# Altium PCB 2WheelBLController.PcbDoc
Units mm, origin at the board's own origin, x right, y up, seen from the top; angles counter-clockwise.
Board outline 37.46 x 61.59 mm, 2 copper layers (Top Layer, Bottom Layer); 17 components, 18 nets, 126 pads, 9 vias.
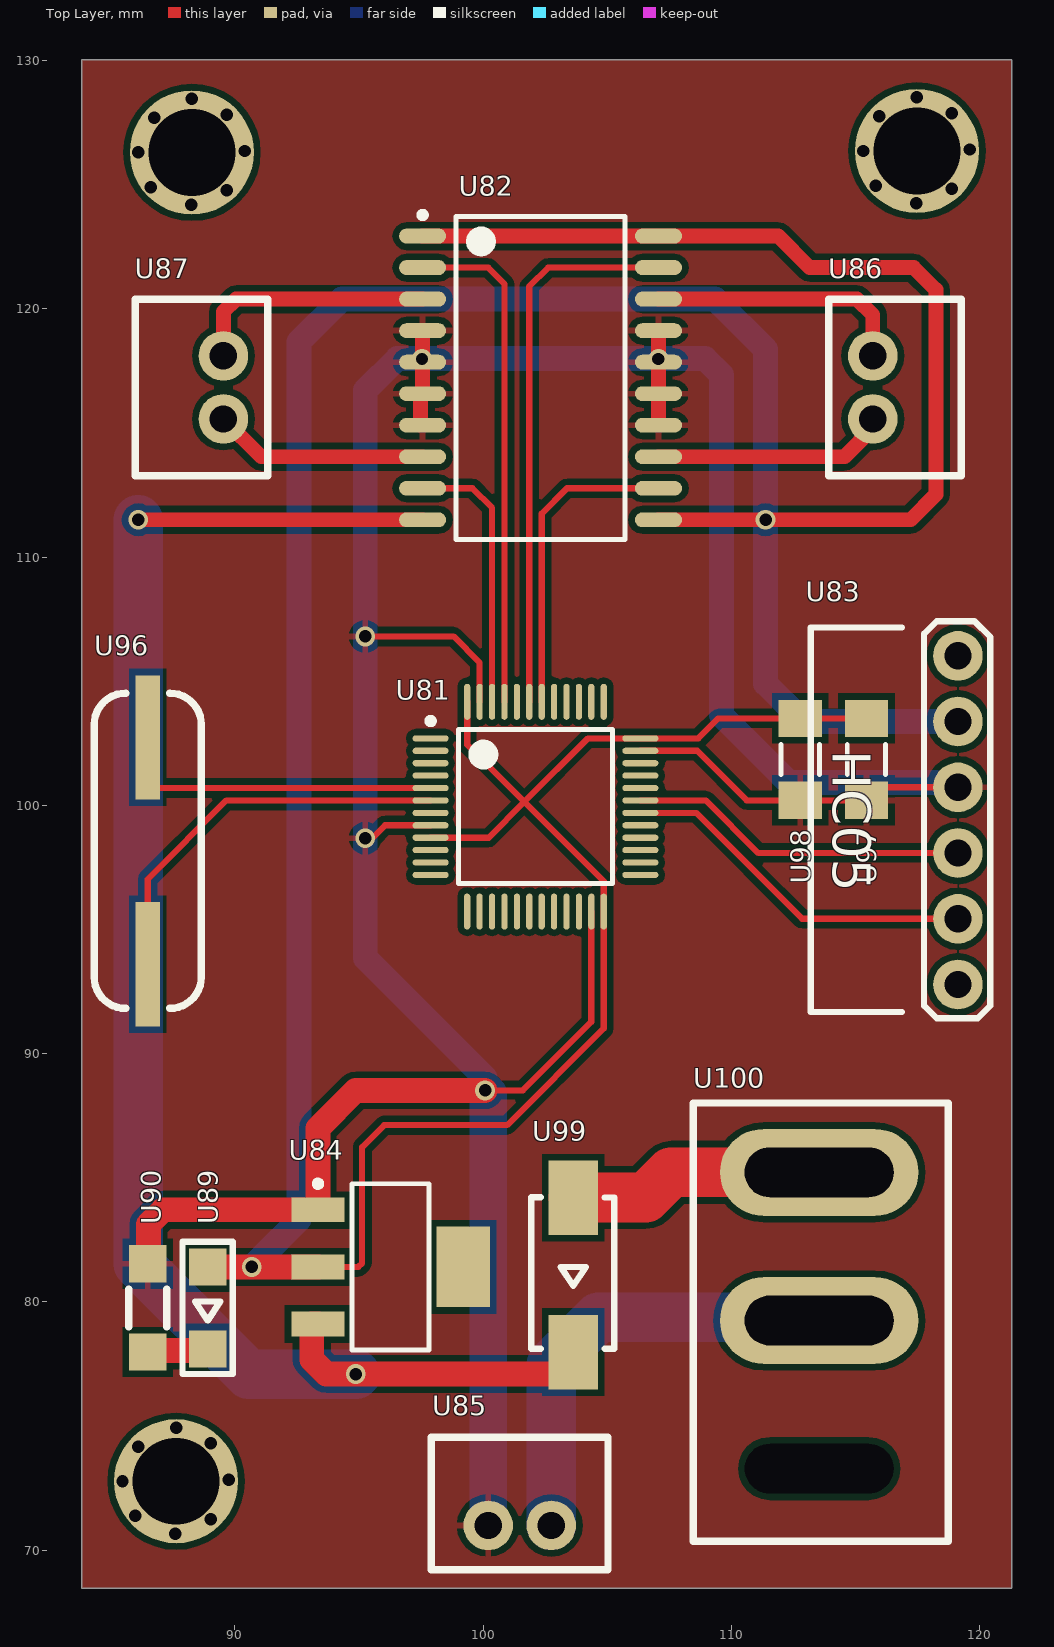
[diagram p0: Top Layer view]
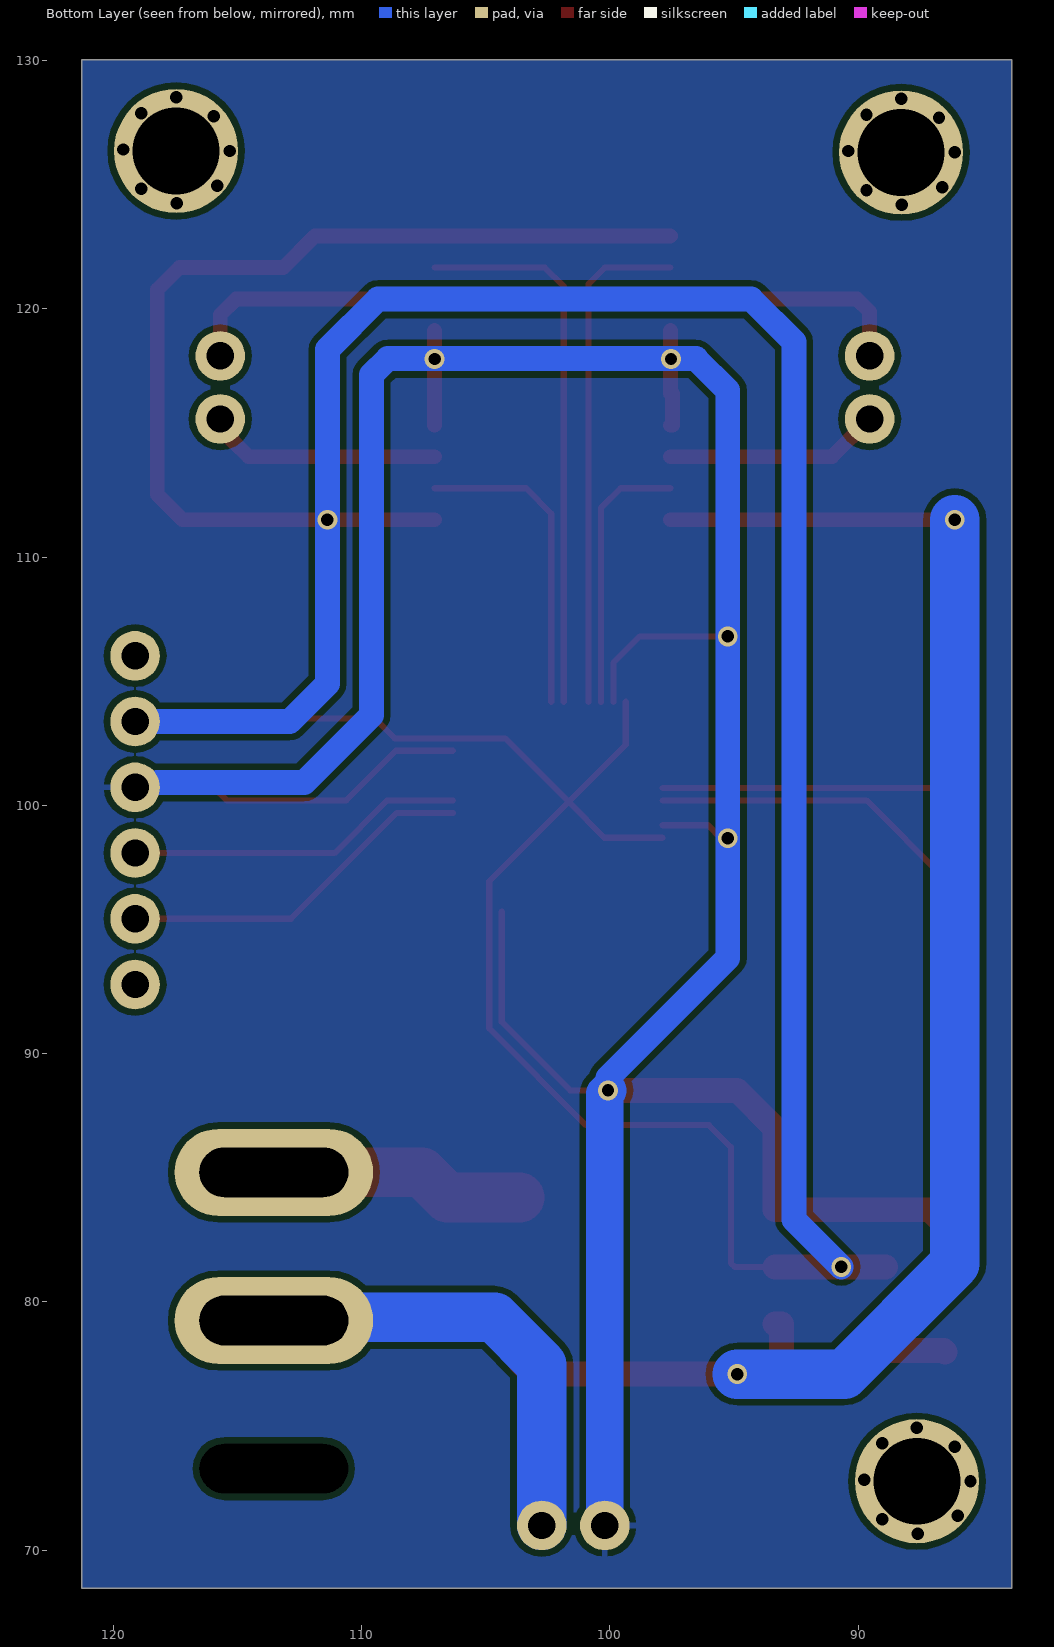
[diagram p1: Bottom Layer view, seen from below]
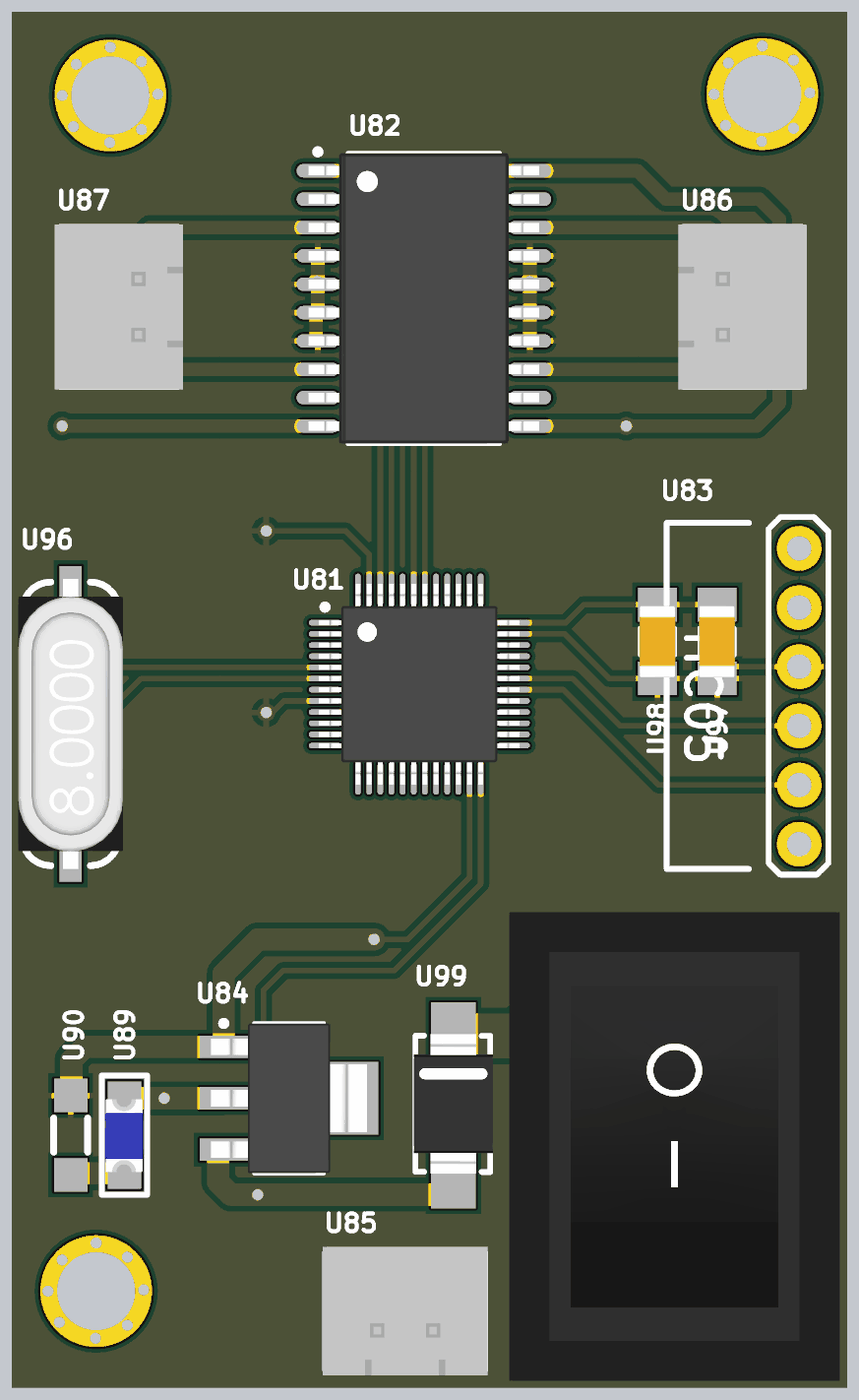
[diagram p2: 3D render of the assembled board from above, using the file's embedded part models]

## Layer stack, top to bottom
Top Solder: solder mask 0.0102, Solder Resist, Dk 3.5
Top Layer: signal copper 0.0356
Dielectric 1: dielectric 0.32, FR-4, Dk 4.8
Bottom Layer: signal copper 0.0356
Bottom Solder: solder mask 0.0102, Solder Resist, Dk 3.5

## Board outline
83.82,68.453 121.285,68.453 121.285,130.048 83.82,130.048

## Design rules (kind name [scope] priority, off if disabled: settings)
Clearance [All] p1: gap=0.254 ignorepadtopadclearanceinfootprint=FALSE except(0: Arc-Hole Track-Hole SMDPad-Hole THPad-Hole Via-Hole Fill-Hole Poly-Hole Region-Hole Text-Hole; 0.25: Arc-Arc Arc-Track Arc-SMDPad Track-Track Track-SMDPad SMDPad-SMDPad)
Height [All] p1 off: minheight=0 maxheight=25.4 prefheight=12.7
PolygonConnect [All] p1: connectstyle=Relief reliefconductorwidth=0.254 reliefentries=4 polygonreliefangle="90 Angle" airgapwidth=0.254
RoutingVias [All] p1: holewidth=0.5 width=0.8 viastyle="Through Hole" minholewidth=0.5 minwidth=0.8 maxholewidth=0.711 maxwidth=1.27
SolderMaskExpansion [All] p1: expansion=0.102 istentingtop=FALSE
Width [All] p1: maxlimit=3 minlimit=0.25 preferedwidth=1
29 further rules are at their usual default settings.

## Components (designator, comment, footprint, x,y, rotation, side; value= is the part's Value field where it differs from the comment)
U81 "Comment" STM32F103C8T6 102.108,99.949 r0 top
U82 "Comment" L293DD 102.311,117.221 r0 top
U83 "Comment" HC05 113.826,99.422 r270 top
U84 "Comment" AMS1117 96.27,81.407 r0 top
U85 "Comment" "XH 2pin" 101.473,71.882 r0 top
U86 "Comment" "XH 2pin" 116.586,116.84 r270 top
U87 "Comment" "XH 2pin" 88.646,116.84 r90 top
U89 "Comment" "LED BLUE 1206" 88.9,79.756 r270 top
U90 "Comment" RES1206 86.487,79.756 r270 top
U96 "Comment" "Crystal Oscilator" 86.487,98.171 r90 top
U97 "Comment" CAP1206 115.443,101.854 r270 top
U98 "Comment" CAP1206 112.776,101.854 r270 top
U99 "Comment" Diode 103.632,81.153 r270 top
U100 "Comment" rocker 113.538,79.248 r0 top
? "Comment" SCREW 87.63,72.771 r0 top
? "Comment" SCREW 117.475,126.365 r0 top
? "Comment" SCREW 88.265,126.306 r0 top

## Footprints (in the part's own frame and the unit in brackets; to place one, negate y for a bottom-side part, rotate by r counter-clockwise, add the part's x,y. Pads: shape width x height; smd on the part's side, far side on the other; paste and mask are expansions set on the pad)
AMS1117 [mm] "SOT223, 4-Leads, Body 6.30x7.00mm (avg), Pitch 2.30mm, IPC Medium Density"
  rect 2.15x1 smd: 1(-2.925,2.3) 2(-2.925,0) 3(-2.925,-2.3)
  rect 2.15x3.25 smd: 4(2.925,0)
  silkscreen extent -3.05,-3.35 1.55,3.47, body extent -3.5,-3.35 3.5,3.35, height 1.65
CAP1206 [mm] "Chip Capacitor, 2-Leads, Body 3.20x1.60mm, IPC Medium Density"
  rect 1.5x1.75 smd: 1(-1.651,0) 2(1.651,0)
  silkscreen extent -0.6,-0.77 0.6,0.77, body extent -1.6,-0.8 1.6,0.8, height 1
"Crystal Oscilator" [mm]
  rect 5x1 smd: 1(-4.572,0) 2(4.572,0)
  silkscreen extent -6.35,-2.16 6.35,2.16, body extent -6.5,-2.35 6.5,2.35, height 4.21
Diode [mm]
  rect 3x2 smd: 1(-3.048,0) 2(3.175,0)
  silkscreen extent -3.06,-1.69 3.05,1.65, body extent -3.12,-1.78 3.12,1.78, height 2.26
HC05 [mm]
  round 2 hole 1.1: 1(-6.605,5.3) 2(-3.956,5.3) 3(-1.308,5.3) 4(1.341,5.3) 5(3.99,5.3) 6(6.639,5.3)
  silkscreen extent -8,-0.64 8,6.6, body extent -8,-1 8,5.55, height 39.5
L293DD [mm] "SOP, 20-Leads, Body 12.80x7.50mm, Pitch 1.27mm, IPC Medium Density"
  oval 1.9x0.6 smd: 1(-4.75,5.715) 2(-4.75,4.445) 3(-4.75,3.175) 4(-4.75,1.905) 5(-4.75,0.635) 6(-4.75,-0.635) 7(-4.75,-1.905) 8(-4.75,-3.175) 9(-4.75,-4.445) 10(-4.75,-5.715) 11(4.75,-5.715) 12(4.75,-4.445) 13(4.75,-3.175) 14(4.75,-1.905) 15(4.75,-0.635) 16(4.75,0.635) 17(4.75,1.905) 18(4.75,3.175) 19(4.75,4.445) 20(4.75,5.715)
  silkscreen extent -4.87,-6.5 3.4,6.69, body extent -5.16,-6.5 5.16,6.5, height 2.35
"LED BLUE 1206" [mm]
  rect 1.5x1.5 smd: 1(-1.651,0) 2(1.651,0)
  silkscreen extent -2.67,-1.02 2.67,1.02, body extent -1.61,-0.85 1.66,0.8, height 0.9
RES1206 [mm]
  rect 1.5x1.5 smd: 1(-1.778,0) 2(1.778,0)
  silkscreen extent -0.76,-0.76 0.76,0.76, body extent -1.58,-0.82 1.58,0.82, height 0.53
rocker [mm]
  oval 8x3.5 hole 2 slot 6 at 0 deg: 1(0,5.969) 2(0,0)
  oval 5x1 hole 2 slot 6 at 0 deg: 3(0,-5.969)
  silkscreen extent -5.08,-8.89 5.21,8.76, body extent -7.4,-10.5 7.4,10.5, height 16.8
SCREW [mm]
  round 5 hole 3.5: 1(0,0)
  round 0 hole 0.5: ""(-2.159,0) ""(-1.651,-1.397) ""(-1.524,1.397) ""(-0.031,-2.11) ""(0,2.159) ""(1.397,-1.524) ""(1.397,1.524) ""(2.128,0.059)
STM32F103C8T6 [mm] "TSQFP, 48-Leads, Body 7.00x7.00mm, Pitch 0.50mm, IPC Medium Density"
  oval 1.45x0.25 smd: 1(-4.225,2.75) 2(-4.225,2.25) 3(-4.225,1.75) 4(-4.225,1.25) 5(-4.225,0.75) 6(-4.225,0.25) 7(-4.225,-0.25) 8(-4.225,-0.75) 9(-4.225,-1.25) 10(-4.225,-1.75) 11(-4.225,-2.25) 12(-4.225,-2.75) 25(4.225,-2.75) 26(4.225,-2.25) 27(4.225,-1.75) 28(4.225,-1.25) 29(4.225,-0.75) 30(4.225,-0.25) 31(4.225,0.25) 32(4.225,0.75) 33(4.225,1.25) 34(4.225,1.75) 35(4.225,2.25) 36(4.225,2.75)
  oval 0.25x1.45 smd: 13(-2.75,-4.225) 14(-2.25,-4.225) 15(-1.75,-4.225) 16(-1.25,-4.225) 17(-0.75,-4.225) 18(-0.25,-4.225) 19(0.25,-4.225) 20(0.75,-4.225) 21(1.25,-4.225) 22(1.75,-4.225) 23(2.25,-4.225) 24(2.75,-4.225) 37(2.75,4.225) 38(2.25,4.225) 39(1.75,4.225) 40(1.25,4.225) 41(0.75,4.225) 42(0.25,4.225) 43(-0.25,4.225) 44(-0.75,4.225) 45(-1.25,4.225) 46(-1.75,4.225) 47(-2.25,4.225) 48(-2.75,4.225)
  silkscreen extent -4.35,-3.1 3.1,3.57, body extent -4.5,-4.5 4.5,4.5, height 1.6
"XH 2pin" [mm]
  round 2 hole 1.1: 1(-1.27,-0.889) 2(1.27,-0.889)
  silkscreen extent -3.56,-2.67 3.56,2.67, body extent -3.7,-2.88 3.7,2.88, height 7

## Via types
v1: diameter 0.8, hole 0.5, Top Layer to Bottom Layer, tented both sides, 9 vias

## Nets (pads, with @x,y where several pads share a name; then routed paths per layer and width w, separated by ;. In a path a pad name is that pad's centre, name@x,y a point inside that pad or via, vN(x,y) a via of type N, cw(c..) or ccw(c..) an arc to the next point about the centre after c; other vN are vias at no path point)
12V: U82.10 U84.3 U99.2 | length 65.1
  Top Layer w0.6: v1(86.106,111.506) U82.10
  Top Layer w1: U84.3 93.091,79.107 93.091,77.675 93.677,77.089 v1(94.869,77.089) 103.132,77.089 103.632,77.589 U99.2
  Bottom Layer w2: v1(86.106,111.506) 86.106,81.534 90.551,77.089 v1(94.869,77.089)
GND: U81.8 U81.23 U81.35 U81.47 U82.4 U82.5 U82.6 U82.7 U82.14 U82.15 U82.16 U82.17 U83.3 U84.1 U85.1 U90.1 U97.2 U98.2 | length 146.7
  Top Layer w0.25: v1(95.25,98.679) 95.526,98.679 96.046,99.199 U81.8 ; v1(95.25,106.807) 98.806,106.807 99.858,105.755 U81.47 ; v1(100.076,88.519) 101.6,88.519 104.358,91.277 U81.23 ; U81.35 108.621,102.199 110.617,100.203 U98.2 U97.2 115.969,100.729 U83.3
  Top Layer w0.6: U82.7 97.476,115.316 97.476,116.586 U82.6 U82.5 U82.4 ; U82.14 U82.15 U82.16 U82.17
  Top Layer w1: U90.1 86.487,81.75 86.521,81.784 86.521,83.121 87.107,83.707 U84.1 93.345,86.995 94.869,88.519 v1(100.076,88.519)
  Bottom Layer w1: v1(100.076,88.519) 100.076,89.027 95.25,93.853 95.25,116.713 96.536,117.999 108.95,117.999 109.601,117.348 109.601,103.632 112.312,100.921 U83.3@118.228,100.921
  Bottom Layer w1.5: v1(100.076,88.519) 100.203,88.392 U85.1
  other v1: 97.536,117.983 107.061,117.983
LED1: U89.2 U90.2 | length 2.5
  Top Layer w1: U90.2 86.55,78.041 88.837,78.041 U89.2
ML1: U82.3 U87.2 | length 10
  Top Layer w0.6: U87.2 89.535,119.888 90.043,120.396 U82.3
ML2: U82.8 U87.1 | length 8.7
  Top Layer w0.6: U87.1 91.059,114.046 U82.8
ML_PIN: U81.45 U82.2 | length 20.4
  Top Layer w0.25: U82.2 100.203,121.666 100.858,121.011 U81.45
ML_PWM: U81.46 U82.9 | length 10.9
  Top Layer w0.25: U82.9 99.568,112.776 100.358,111.986 U81.46
MR1: U82.18 U86.1 | length 10.6
  Top Layer w0.6: U82.18 115.062,120.396 115.697,119.761 U86.1
MR2: U82.13 U86.2 | length 9.5
  Top Layer w0.6: U82.13 114.554,114.046 115.144,114.636 115.144,114.638 115.697,115.191 U86.2
MR_PIN: U81.43 U82.19 | length 22.3
  Top Layer w0.25: U81.43 101.858,120.908 102.616,121.666 U82.19
MR_PWM: U81.42 U82.12 | length 12.7
  Top Layer w0.25: U81.42 102.358,111.756 103.378,112.776 U82.12
OSC_IN: U81.5 U96.2 | length 13.2
  Top Layer w0.25: U96.2 86.487,101.074 86.862,100.699 U81.5
OSC_OUT: U81.6 U96.1 | length 16.1
  Top Layer w0.25: U96.1 86.487,97.028 89.658,100.199 U81.6
RX: U81.30 U83.5 | length 14.6
  Top Layer w0.25: U81.30 108.581,99.699 112.848,95.432 U83.5
TX: U81.31 U83.4 | length 13.7
  Top Layer w0.25: U81.31 108.97,100.199 111.089,98.08 U83.4
VBAT: U85.2 U100.2 | length 18.1
  Bottom Layer w2: U85.2 102.743,77.47 104.648,79.375 113.411,79.375 U100.2
VCC: U81.9 U81.24 U81.36 U81.48 U82.1 U82.11 U82.20 U83.2 U84.2 U89.1 U97.1 U98.1 | length 179.3
  Top Layer w0.25: U84.2 94.977,81.407 95.123,81.553 95.123,86.233 96.012,87.122 100.965,87.122 104.858,91.015 U81.24 104.858,96.945 101.663,100.139 ; U81.9 100.223,98.699 101.663,100.139 ; U81.48 99.358,102.445 101.663,100.139 ; U97.1 U98.1 109.474,103.505 108.668,102.699 U81.36 104.223,102.699 101.663,100.139
  Top Layer w0.6: U82.1 U82.20 111.887,122.936 113.157,121.666 117.348,121.666 118.237,120.777 118.237,112.522 117.221,111.506 v1(111.379,111.506) U82.11
  Top Layer w1: U89.1 v1(90.678,81.407) U84.2
  Bottom Layer w1: v1(90.678,81.407) 92.583,83.312 92.583,118.677 94.302,120.396 109.347,120.396 111.379,118.364 v1(111.379,111.506) 111.379,104.902 112.903,103.378 U83.2
Vin: U99.1 U100.1 | length 10.3
  Top Layer w2: U99.1 106.553,84.201 107.569,85.217 U100.1
pads on no net: ?. ?.1 U81.1 U81.2 U81.3 U81.4 U81.7 U81.10 U81.11 U81.12 U81.13 U81.14 U81.15 U81.16 U81.17 U81.18 U81.19 U81.20 U81.21 U81.22 U81.25 U81.26 U81.27 U81.28 U81.29 U81.32 U81.33 U81.34 U81.37 U81.38 U81.39 U81.40 U81.41 U81.44 U83.1 U83.6 U84.4 U100.3

## Polygon pours and split planes (outlines as drawn)
GND on Top Layer "GND_L01_P000" (solid, pour order 0): 83.82,68.453 121.285,68.453 121.285,130.048 83.82,130.048
GND on Bottom Layer "GND_L02_P002" (solid, pour order 2): 83.82,68.453 121.285,68.453 121.285,130.048 83.82,130.048

## Silkscreen, mask and mechanical layers (free items; w line width, h text height)
Mechanical 1:
  the board outline again, w0.3

## Text inside footprints (layer, text, board x,y; h text height)
U83: Top Overlay "HC05" at 114.08,102.215 h1.52 r270